# Altium PCB MainBoard_old.PcbDoc
Units mm, origin at the board's own origin, x right, y up, seen from the top; angles counter-clockwise.
Board outline 78.74 x 38.1 mm, 2 copper layers (Top Layer, Bottom Layer), stack 1.671 mm thick; 43 components, 29 nets, 188 pads, 17 vias.
Unrouted connection lines stored in the file: 48.
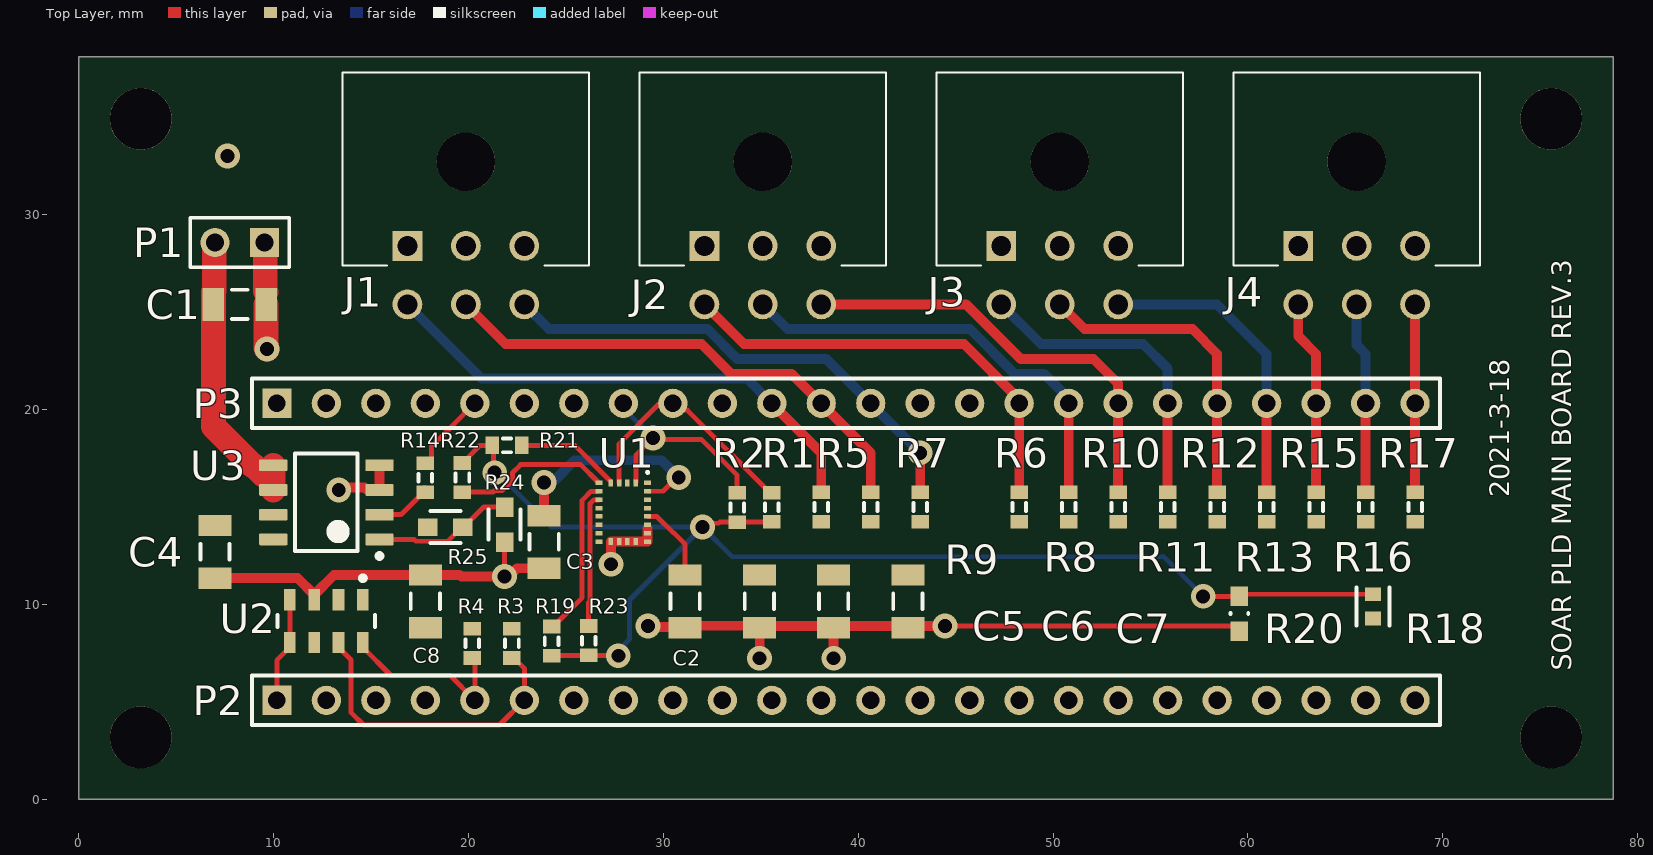
[diagram p0: Top Layer view]
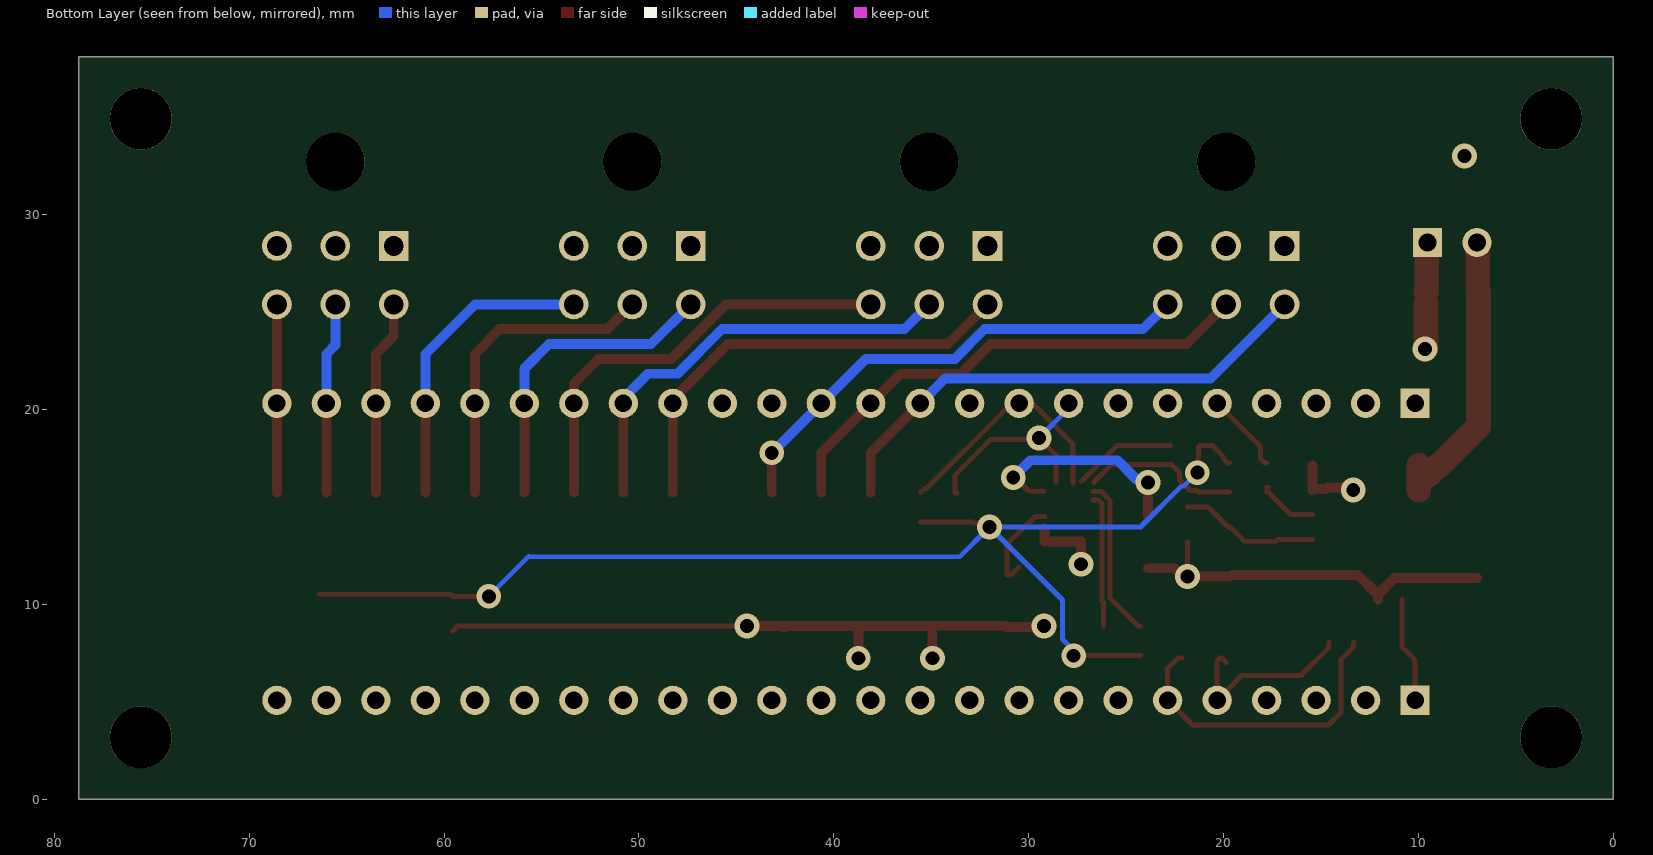
[diagram p1: Bottom Layer view, seen from below]

## Layer stack, top to bottom
Top Solder: solder mask 0.0102, Solder Resist, Dk 3.5
Top Layer: signal copper 0.0356
Dielectric 1: dielectric 1.6002, FR-4, Dk 4.8
Bottom Layer: signal copper 0.0356
Bottom Solder: solder mask 0.0102, Solder Resist, Dk 3.5

## Board outline
0,0 78.74,0 78.74,38.1 0,38.1

## Design rules (kind name [scope] priority, off if disabled: settings)
Clearance [All] p1: gap=0.152 ignorepadtopadclearanceinfootprint=FALSE
Height [All] p1: minheight=0 maxheight=50.8 prefheight=12.7
HoleSize [All] p1: absolutevalues=TRUE maxlimit=3.175 minlimit=0.001 maxpercent=80.000 minpercent=20.000
HoleToHoleClearance [All] p1: gap=0.006 allowstackedmicrovias=TRUE
MinimumAnnularRing [All] p1: minimumring=0.254
MinimumSolderMaskSliver [All] p1: minsoldermaskwidth=0
PolygonConnect [All] p1: connectstyle=Relief reliefconductorwidth=0.254 reliefentries=4 polygonreliefangle="90 Angle" airgapwidth=0.254
RoutingVias [All] p1: holewidth=0.711 width=1.27 viastyle="Through Hole" minholewidth=0.711 minwidth=1.27 maxholewidth=0.711 maxwidth=1.27
SilkToSilkClearance [All] p1: silktosilkclearance=0
SilkToSolderMaskClearance [IsPad] p1: minsilkscreentomaskgap=0 clearancetoexposedcopper=TRUE
SolderMaskExpansion [All] p1: expansion=0.003 istentingtop=FALSE
UnRoutedNet [All] p1: checkbadconnections=TRUE
Width [All] p1: maxlimit=1.27 minlimit=0.152 preferedwidth=0.254
23 further rules are at their usual default settings.

## Components (designator, comment, footprint, x,y, rotation, side; value= is the part's Value field where it differs from the comment)
C1 "Cap Semi" C1206 8.255,25.4 r180 top value=0.1uF
C2 "Cap Semi" C1206 31.115,10.16 r90 top value=10nF
C3 "Cap Semi" C1206 23.876,13.208 r90 top value=0.1uF
C4 "Cap Semi" C1206 6.985,12.7 r90 top value=0.1uF
C5 "Cap Semi" C1206 34.925,10.16 r90 top value=10uF
C6 "Cap Semi" C1206 38.735,10.16 r90 top value=0.1uF
C7 "Cap Semi" C1206 42.545,10.16 r90 top value=0.1uF
C8 "Cap Semi" C1206 17.78,10.16 r270 top value=10uF
J1 "0430450600" 0430450600 19.835,30.56 r180 top
J2 "0430450600" 0430450600 35.075,30.56 r180 top
J3 "0430450600" 0430450600 50.315,30.56 r180 top
J4 "0430450600" 0430450600 65.555,30.56 r180 top
P1 "Header 2" HDR1X2 9.525,28.575 r180 top
P2 "Header 24" HDR1X24 10.16,5.08 r0 top
P3 "Header 24" HDR1X24 10.16,20.32 r0 top
R1 "Res3" J1-0603 35.56,14.986 r270 top value=10K
R2 "Res3" J1-0603 33.782,14.974 r270 top value=10K
R3 "Res3" J1-0603 22.225,8.001 r90 top value=10K
R4 "Res3" J1-0603 20.193,8.001 r90 top value=10K
R5 "Res3" J1-0603 38.1,14.998 r90 top value=10K
R6 "Res3" J1-0603 48.26,14.998 r90 top value=10K
R7 "Res3" J1-0603 40.64,14.998 r90 top value=10K
R8 "Res3" J1-0603 50.8,14.998 r90 top value=10K
R9 "Res3" J1-0603 43.18,14.998 r90 top value=10K
R10 "Res3" J1-0603 53.34,14.998 r90 top value=10K
R11 "Res3" J1-0603 55.88,14.998 r90 top value=10K
R12 "Res3" J1-0603 58.42,14.998 r90 top value=10K
R13 "Res3" J1-0603 60.96,14.998 r90 top value=10K
R14 "Res3" J1-0603 17.78,16.498 r270 top value=250K
R15 "Res3" J1-0603 63.5,14.998 r90 top value=10K
R16 "Res3" J1-0603 66.04,14.998 r90 top value=10K
R17 "Res3" J1-0603 68.58,14.998 r90 top value=10K
R18 "105K" FP-RQ731J-IPC_C 66.421,9.897 r270 top value=105Ω
R19 "Res3" J1-0603 24.257,8.116 r90 top value=10K
R20 "931K" FP-RP73P-1J-MFG 59.563,9.525 r90 top value=931Ω
R21 "Res3" J1-0603 21.971,18.161 r180 top value=10K
R22 "Res3" J1-0603 19.685,16.51 r90 top value=10K
R23 "Res3" J1-0603 26.162,8.14 r270 top value=10K
R24 "340K" FP-RN731J-MFG 18.807,13.97 r0 top value=340KΩ
R25 "169K" FP-RN731J-MFG 21.844,14.097 r270 top value=169KΩ
U1 "LSM9DS1TR" STM-LGA-24_3500X3000X1000 27.94,14.732 r270 top
U2 "MS560702BA03-50" TECO-MS560702BA03-50_V 12.7,9.144 r270 top
U3 "TPS76633DR" D0008A_N 12.7,15.24 r180 top

## Footprints (in the part's own frame and the unit in brackets; to place one, negate y for a bottom-side part, rotate by r counter-clockwise, add the part's x,y. Pads: shape width x height; smd on the part's side, far side on the other; paste and mask are expansions set on the pad)
0430450600 [mm] "6-Pin Molex 3.00mm Pitch"
  round 3 hole 3 unplated mask+0.05: 0(-0.025,-2.16)
  rect 1.53x1.53 hole 1.02 mask+0.05: 1(2.975,2.16)
  round 1.53 hole 1.02 mask+0.05: 2(-0.025,2.16) 3(-3.025,2.16) 4(2.975,5.16) 5(-0.025,5.16) 6(-3.025,5.16)
  silkscreen extent -6.35,-6.75 6.3,3.17, body extent -6.6,-6.7 6.55,5.54, height 8.28
C1206 [mm] "Chip Capacitor, Body 3.2x1.6mm, IPC High Density"
  rect 1.1x1.7 smd: 1(-1.35,0) 2(1.35,0)
  silkscreen extent -0.4,-0.75 0.4,0.75, body extent -1.7,-0.9 1.7,0.9, height 1.3
D0008A_N [mm] "SOIC, 8-Leads, Body 5x4mm, Pitch 1.27mm, IPC Medium Density"
  rrect17% 1.45x0.6 smd: 1(-2.725,1.905) 2(-2.725,0.635) 3(-2.725,-0.635) 4(-2.725,-1.905) 5(2.725,-1.905) 6(2.725,-0.635) 7(2.725,0.635) 8(2.725,1.905)
  silkscreen extent -2.85,-2.5 1.6,2.88, body extent -3,-2.45 3,2.45, height 1.63
FP-RN731J-MFG [mm]
  rect 1x0.9 smd paste+0 mask+0: 1(-0.9,0) 2(0.9,0)
  silkscreen extent -0.77,-0.82 0.77,0.82, body extent -1.5,-0.55 1.5,0.55, height 0.25
FP-RP73P-1J-MFG [mm]
  rect 1x0.9 smd paste+0 mask+0: 1(-0.9,0) 2(0.9,0)
  silkscreen extent -0.03,-0.45 0.03,0.45, body extent -1.5,-0.55 1.5,0.55, height 0.25
FP-RQ731J-IPC_C [mm]
  rect 0.71x0.812 smd paste+0 mask+0: 1(-0.626,0) 2(0.626,0)
  silkscreen extent -0.98,-0.85 0.98,0.85, body extent -1.08,-0.55 1.08,0.55, height 0.25
HDR1X2 [mm] "Connector; Header; 2 Position"
  rect 1.5x1.5 hole 0.9: 1(0,0)
  round 1.5 hole 0.9: 2(2.54,0)
  silkscreen extent -1.27,-1.27 3.81,1.27
HDR1X24 [mm] "Connector; Header; 24 Position"
  rect 1.5x1.5 hole 0.9: 1(0,0)
  round 1.5 hole 0.9: 2(2.54,0) 3(5.08,0) 4(7.62,0) 5(10.16,0) 6(12.7,0) 7(15.24,0) 8(17.78,0) 9(20.32,0) 10(22.86,0) 11(25.4,0) 12(27.94,0) 13(30.48,0) 14(33.02,0) 15(35.56,0) 16(38.1,0) 17(40.64,0) 18(43.18,0) 19(45.72,0) 20(48.26,0) 21(50.8,0) 22(53.34,0) 23(55.88,0) 24(58.42,0)
  silkscreen extent -1.27,-1.27 59.69,1.27
J1-0603 [mm] "Chip Resistor, Body 1.6x0.8mm, IPC High Density"
  rect 0.7x0.9 smd: 1(-0.75,0) 2(0.75,0)
  silkscreen extent -0.2,-0.35 0.2,0.35, body extent -0.85,-0.48 0.85,0.48, height 0.9
STM-LGA-24_3500X3000X1000 [mm] "LGA, 24-Leads, Body 3.65x3.15mm, Pitch 0.43mm"
  rect 0.23x0.35 smd mask+0.05: 1(-1.505,1.25) 6(-1.505,-1.25) 7(-1.075,-1.25) 8(-0.645,-1.25) 9(-0.215,-1.25) 10(0.215,-1.25) 11(0.645,-1.25) 12(1.075,-1.25) 13(1.505,-1.25) 18(1.505,1.25) 19(1.075,1.25) 20(0.645,1.25) 21(0.215,1.25) 22(-0.215,1.25) 23(-0.645,1.25) 24(-1.075,1.25)
  rect 0.35x0.23 smd mask+0.05: 2(-1.505,0.645) 3(-1.505,0.215) 4(-1.505,-0.215) 5(-1.505,-0.645) 14(1.505,-0.645) 15(1.505,-0.215) 16(1.505,0.215) 17(1.505,0.645)
  silkscreen extent -2.11,1.19 -1.98,1.31, body extent -1.82,-1.57 1.83,1.58, height 1.03
TECO-MS560702BA03-50_V [mm] "SMD, 8-Leads, Body 3x5mm, Pitch 1.25mm"
  rect 1.1x0.6 smd: 1(-1.1,1.875) 2(-1.1,0.625) 3(-1.1,-0.625) 4(-1.1,-1.875) 5(1.1,-1.875) 6(1.1,-0.625) 7(1.1,0.625) 8(1.1,1.875)
  silkscreen extent -2.32,-2.5 0.32,2.5, body extent -1.5,-2.5 1.5,2.5, height 1

## Part data
C1 C2 C3 C4 C5 C6 C7 C8: "Capacitor (Semiconductor SIM Model)", LatestRevisionDate=29-May-2009, LatestRevisionNote="IPC-7351 Footprint Added.", PackageDescription="Chip Capacitor", PackageReference=C1206, Published=8-Jun-2000, Publisher="Altium Limited"
J1 J2 J3 J4: "CONN HEADER R/A 6POS 3MM", Current Rating (Amps)=8A, Insulation Color=Black, Manufacturer=Molex, Material Flammability Rating="UL94 V-0", Supplier Part Number 1=WM1815-ND, Voltage Rating=600V, ComponentLink1Description=Drawing, ComponentLink1URL=https://www.molex.com/pdm_docs/sd/430450600_sd.pdf, ComponentLink2Description="Product Specification", ComponentLink2URL=https://www.molex.com/pdm_docs/ps/PS-43045.pdf, Contact Finish - Mating=Tin, Contact Finish - Post=Tin, Contact Finish Thickness - Mating="100.0µin (2.54µm)", Contact Length - Post="0.125\" (3.18mm)", Contact Material=Brass, Contact Shape=Square, Contact Type="Male Pin", Fastening Type="Locking Ramp", Features="Board Lock", Insulation Height="0.290\" (7.37mm)", Insulation Material="Liquid Crystal Polymer (LCP), Glass Filled", Manufacturer Part Number=0430450600, Mounting Type="Through Hole, Right Angle", Number of Positions=6, Number of Rows=2, Row Spacing - Mating="0.118\" (3.00mm)", Shrouding="Shrouded - 4 Wall", Supplier 1=Digi-Key, Termination=Solder
P1: "Header, 2-Pin", LatestRevisionDate=17-Jul-2002, LatestRevisionNote="Re-released for DXP Platform.", Publisher="Altium Limited"
P2 P3: "Header, 24-Pin", LatestRevisionDate=17-Jul-2002, LatestRevisionNote="Re-released for DXP Platform.", Publisher="Altium Limited"
R1 R2 R3 R4 R5 R6 R7 R8 R9 R10 R11 R12 R13 R14 R15 R16 R17 R19 R21 R22 R23: "Resistor", LatestRevisionDate=29-May-2009, LatestRevisionNote="IPC-7351 Footprint Added.", PackageDescription="Chip Resistor", PackageReference=J1-0603, Published=8-Jun-2000, Publisher="Altium Limited"
R18: library part CMP-03211-009462-1, "RQ73 0603 105Ω  0.15W 10ppm/°C 0.1% 75V", Manufacturer=TE, Manufacturer Part Number=RQ73C1J105RBTD, Package=RQ731J, Power Rating=0.15W, Resistance=105Ω, Temperature="-55°C to +155°C", Temperature Coefficient=10ppm/°C, Temperature Range High=+155°C, Temperature Range Low=-55°C, Tolerance=0.1%, Voltage Rating=75V, Automotive=Yes, Automotive Grade="Grade 0", Category=Res, ComponentLink2Description=Datasheet, ComponentLink2URL=https://www.te.com/commerce/DocumentDelivery/DDEController?Action=showdoc&DocId=Data+Sheet%7F1773270-2%7FA%7Fpdf%7FEnglish%7FENG_DS_1773270-2_A.pdf%7F4-2176362-2, Composition="Thin Film", Device Class L1="Passive Components", Device Class L2=Resistors, Device Class L3="Chip SMD Resistors", Height=0.6mm, Ipc Land Pattern Name=RESC15580X45, Lead Free=Yes, Octopart=https://octopart.com/rq73c1j105rbtd-te+connectivity-93908198, RoHS=TRUE, Series=RQ73
R20: library part CMP-03211-003729-1, "RES SMD 931 OHM 0.1% 1/6W 0603", Manufacturer="TE Connectivity", Manufacturer Part Number=RP73PF1J931RBTDF, Package=RP73P-1J, Power Rating=0.166W, Resistance=931Ω, Temperature="-55°C to +155°C", Temperature Coefficient=25ppm/°C, Temperature Range High=+155°C, Temperature Range Low=-55°C, Tolerance=0.001, Voltage Rating=100V, Automotive=No, Category=Res, ComponentLink2Description=Datasheet, ComponentLink2URL=https://www.te.com/commerce/DocumentDelivery/DDEController?Action=srchrtrv&DocNm=1773272&DocType=DS&DocLang=English, Composition="Thin Film", Device Class L1="Passive Components", Device Class L2=Resistors, Device Class L3="Chip SMD Resistors", Digikey Description="RES SMD 931 OHM 0.1% 1/6W 0603", Height=0.55mm, Ipc Land Pattern Name=RESC15580X45, Lead Free=Yes, Octopart=https://octopart.com/rp73pf1j931rbtdf-te+connectivity-45466309, RoHS=TRUE, Series=RP73P
R24: library part CMP-03211-007046-1, "Thin Film Resistors RN 0603 340KΩ 0.1% 10ppm/°C", Manufacturer="TE Connectivity", Manufacturer Part Number=RN73C1J340KBTD, Package=RN731J, Power Rating=0.063W, Resistance=340KΩ, Temperature="-55°C to +155°C", Temperature Coefficient=10ppm/°C, Temperature Range High=+155°C, Temperature Range Low=-55°C, Tolerance=0.1%, Voltage Rating=50V, Automotive=No, Category=Res, ComponentLink2Description=Datasheet, ComponentLink2URL=https://www.te.com/commerce/DocumentDelivery/DDEController?Action=showdoc&DocId=Data+Sheet%7F1773270%7FP%7Fpdf%7FEnglish%7FENG_DS_1773270_P.pdf%7F9-1614352-9, Composition="Thin Film", Device Class L1="Passive Components", Device Class L2=Resistors, Device Class L3="Chip SMD Resistors", Height=0.55mm, Ipc Land Pattern Name=RESC15580X45, Lead Free=Yes, Octopart=https://octopart.com/rn73c1j340kbtd-te+connectivity-76689871, octopart_url=https://octopart.com/rn73c1j340kbtd-te+connectivity-76689871, Packaging="5000 Reel", RoHS=TRUE, Series=RN73
R25: library part CMP-03211-006461-1, "Thin Film Resistors RN 0603 169KΩ 0.1% 10ppm/°C", Manufacturer="TE Connectivity", Manufacturer Part Number=RN73C1J169KBTDF, Package=RN731J, Power Rating=0.063W, Resistance=169KΩ, Temperature="-55°C to +155°C", Temperature Coefficient=10ppm/°C, Temperature Range High=+155°C, Temperature Range Low=-55°C, Tolerance=0.1%, Voltage Rating=50V, Automotive=No, Category=Res, ComponentLink2Description=Datasheet, ComponentLink2URL=https://www.te.com/commerce/DocumentDelivery/DDEController?Action=showdoc&DocId=Data+Sheet%7F1773270%7FP%7Fpdf%7FEnglish%7FENG_DS_1773270_P.pdf%7F9-1614352-9, Composition="Thin Film", Device Class L1="Passive Components", Device Class L2=Resistors, Device Class L3="Chip SMD Resistors", Height=0.55mm, Ipc Land Pattern Name=RESC15580X45, Lead Free=Yes, Octopart=https://octopart.com/rn73c1j169kbtdf-te+connectivity-22738579, octopart_url=https://octopart.com/rn73c1j169kbtdf-te+connectivity-22738579, Packaging="1000 Reel", RoHS=TRUE, Series=RN73
U1: library part CMP-2000-06606-1, "iNEMO Inertial Module: 3D Accelerometer, 3D Gyroscope, 3D Magnetometer, 1.9 to 3.6 V, -40 to 85 degC, 24-Pin LGA, RoHS, Tape and Reel", Manufacturer=STMicroelectronics, Package Description="24-Pin Plastic Land Grid Array Package, Body 3.65 x 3.15 mm, Pitch 0.43 mm", Package Reference=LGA-24_3500X3000X1000, PartNumber=LSM9DS1, Sensor Case Style=LGA, Supply Voltage Max=3.6V, Supply Voltage Min=1.9V, Acceleration Range=±2g,±4g,±8g,±16g, Datasheet URL=http://www2.st.com/content/ccc/resource/technical/document/datasheet/1e/3f/2a/d6/25/eb/48/46/DM00103319.pdf/files/DM00103319.pdf/jcr:content/translations/en.DM00103319.pdf, Datasheet Version="Rev. 3, 03/2015", Gyroscope Range=±245°/s,±500°/s,±2000°/s, Manufacturer URL=http://www.st.com/, MEMS Module Function=Tri-AxisGyroscope,Tri-AxisAccelerometer,Tri-AxisMagnetometer, Mounting Technology=SurfaceMount, MSL=MSL3-168hours, No. of Pins=24Pins, Packaging=CutTape, Product Range=-, SVHC=NoSVHC(17-Dec-2015)
U2: library part CMP-2000-07512-1, "Barometric Pressure Sensor, with Stainless Steel Cap , 1.8 to 3.6 V, -40 to 85 degC, 8-Pin SMD, RoHS, Tape and Reel", Manufacturer="TE Connectivity", Package Description="8-Pin Surface Mount Device, Body 3 x 5 mm, Pitch 1.25 mm", Datasheet URL=http://www.te.com/commerce/DocumentDelivery/DDEController?Action=showdoc&DocId=Data+Sheet%7FMS5607-02BA03%7FB2%7Fpdf%7FEnglish%7FENG_DS_MS5607-02BA03_B2.pdf%7FMS560702BA03-50, Datasheet Version=06/2017, Lead Free=LeadFree, Manufacturer URL=http://www.te.com/, Mounting Technology=SurfaceMount, Package Reference=MS560702BA03-50, RoHSCompliant=false
U3: library part CMP-0394-00013-2, "Single Output LDO, 250 mA, Fixed 3.3 V Output, 2.7 to 10 V Input, with Low IQ, 8-pin SOIC (D), -40 to 125 degC, Green (RoHS & no Sb/Br)", Manufacturer="Texas Instruments", Power Good=TRUE, Code_JEDEC=MS-012, ComponentLink1Description="Manufacturer URL", ComponentLink1URL=http://www.ti.com/, ComponentLink2Description=Datasheet, ComponentLink2URL=http://www.ti.com/general/docs/lit/getliterature.tsp?genericPartNumber=TPS76633&fileType=pdf, ComponentLink3Description="Package Specification", ComponentLink3URL=http://www.ti.com/litv/pdf/msoi002j, DatasheetVersion=SLVS237C, Eco-Plan="Green (RoHS & no Sb/Br)", Fixed Output Options(V)=3.3, Iout(Max)(A)=0.25, Iq(Typ)(mA)=0.03, Mounting Technology="Surface Mount", PackageDescription="8-Pin Plastic Small Outline, Body 4.9 x 3.9 mm, Pitch 1.27 mm", PackageReference=D0008A, PackageVersion=4040047-3/M, PartNumber=TPS76633DR, SubFamily="Single Channel LDO", Vdo(Typ)(mV)=230, Vin(Max)(V)=10, Vin(Min)(V)=2.7, Vout Adj(Max)(V)=3.3, Vout Adj(Min)(V)=3.3

## Free pads (board coordinates)
  round 3.175 hole 3.175: ""(3.175,3.175) ""(3.175,34.925) ""(75.565,3.175) ""(75.565,34.925)

## Via types
v1: diameter 1.27, hole 0.711, Top Layer to Bottom Layer, 16 vias
v2: diameter 1.27, hole 0.711, Top Layer to Bottom Layer, tented top, 1 vias

## Nets (pads, with @x,y where several pads share a name; then routed paths per layer and width w, separated by ;. In a path a pad name is that pad's centre, name@x,y a point inside that pad or via, vN(x,y) a via of type N, cw(c..) or ccw(c..) an arc to the next point about the centre after c; other vN are vias at no path point)
A0: J1.6 P3.13 R9.2 | length 25.5
  Top Layer w0.508: R9.2 v1(43.18,17.78)
  Bottom Layer w0.508: J1.6 24.133,24.127 32.261,24.127 33.785,22.603 38.357,22.603 v1(43.18,17.78)
A1: J1.5 P3.12 R7.2 | length 26
  Top Layer w0.508: J1.5 21.895,23.365 31.945,23.365 33.469,21.841 36.579,21.841 40.64,17.78 R7.2
A2: J1.4 P3.11 R5.2 | length 26.6
  Top Layer w0.508: J1.4@16.764,25.304 J1.4 ; P3.11 38.1,17.78 R5.2
  Bottom Layer w0.508: J1.4 20.67,21.59 34.29,21.59 P3.11
A14: J4.6 P3.24 R17.2 | length 9.7
  Top Layer w0.508: R17.2 P3.24 J4.6
A15: J4.5 P3.23 R16.2 | length 9.8
  Top Layer w0.508: R16.2 P3.23
  Bottom Layer w0.508: J4.5 65.58,23.32 66.04,22.86 P3.23
A16: J4.4 P3.22 R15.2 | length 10
  Top Layer w0.508: J4.4 62.58,23.78 63.5,22.86 P3.22 R15.2
A17: J3.6 P3.21 R13.2 | length 15.8
  Top Layer w0.508: R13.2 P3.21
  Bottom Layer w0.508: J3.6 58.42,25.4 60.96,22.86 P3.21
A18: J3.5 P3.20 R12.2 | length 16.2
  Top Layer w0.508: J3.5 51.613,24.127 57.153,24.127 58.42,22.86 P3.20 R12.2
A19: J3.4 P3.19 R11.2 | length 16.4
  Top Layer w0.508: J3.4 J3.4@47.498,25.4 ; R11.2 P3.19
  Bottom Layer w0.508: J3.4 49.375,23.365 54.61,23.365 55.88,22.095 P3.19
A20: J2.6 P3.18 R10.2 | length 22.5
  Top Layer w0.508: J2.6 45.54,25.4 48.337,22.603 52.07,22.603 53.337,21.336 53.337,20.323 P3.18 R10.2
A21: J2.5 P3.17 R8.2 | length 22.5
  Top Layer w0.508: R8.2 P3.17 P3.17@50.8,20.571
  Bottom Layer w0.508: J2.5 36.373,24.127 45.735,24.127 48.021,21.841 49.53,21.841 P3.17@50.8,20.571
A22: J2.4 P3.16 R6.2 | length 23
  Top Layer w0.508: J2.4 34.135,23.365 45.419,23.365 48.26,20.524 P3.16 R6.2
GND: C1.1 C2.1 C3.1 C4.1 C5.1 C6.1 C7.1 C8.1 J1.1 J1.2 J1.3 J2.1 J2.2 J2.3 J3.1 J3.2 J3.3 J4.1 J4.2 J4.3 P1.1 P2.1 P3.15 R20.1 R25.2 U1.14 U1.15 U1.16 U1.17 U1.18 U1.19 U1.20 U2.3 U2.4 U2.5 U3.3 U3.4 | length 71.3
  Top Layer w0.254: P2.1 10.16,7.129 10.825,7.794 U2.5 U2.4 ; v1(21.844,11.43) R25.2 ; v1(44.45,8.89) 59.298,8.89 R20.1
  Top Layer w0.508: C4.1 11.219,11.35 U2.3@12.075,10.494 ; U2.3 U2.3@12.075,10.494 ; v1(13.335,15.875) 13.462,16.002 14.662,16.002 14.743,15.921 15.379,15.921 U3.3 U3.4 ; C3.1 22.478,11.858 22.05,11.43 v1(21.844,11.43) 19.629,11.43 19.549,11.51 C8.1 13.091,11.51 U2.3@12.075,10.494 ; v1(27.305,12.065) 27.305,13.213 27.307,13.215 U1.14 U1.15 U1.16 U1.17 U1.18 U1.19 29.19,13.894 ; v1(29.21,8.89) 29.25,8.85 31.075,8.85 C2.1 31.209,8.904 34.831,8.904 34.943,8.792 34.943,7.257 v1(34.925,7.239) ; C5.1@34.925,8.89 38.655,8.89 C6.1 ; v1(38.735,7.239) C6.1 ; v1(44.45,8.89) 42.625,8.89 C7.1 42.465,8.89 38.815,8.89 C6.1
  Top Layer w1.27: P1.1@9.565,28.575 9.565,26.075 C1.1@9.605,26.035 ; C1.1 9.605,23.161 v1(9.652,23.114)
NetC1_2: C1.2 P1.2 U3.5 U3.6 | length 14.4
  Top Layer w1.27: P1.2@6.985,28.615 6.945,28.575 6.945,26.075 6.905,26.035 C1.2 6.905,19.13 8.906,17.129 8.966,17.129 9.463,16.633 ; U3.6 9.975,16.633 U3.5
NetC2_2: C2.2 U1.21 | length 4.9
  Top Layer w0.254: U1.21 29.202,14.505 29.672,14.505 30.48,13.697 30.499,13.697 31.115,13.081 C2.2 30.903,11.51 C2.2@30.48,11.933
NetC3_2: C3.2 U1.24 | length 11.1
  Top Layer w0.229: U1.24 29.977,15.807
  Top Layer w0.254: 29.977,15.807 30.68,16.51 v2(30.789,16.51)
  Top Layer w0.508: C3.2 v1@23.876,16.002
  Bottom Layer w0.508: v1(23.876,16.256) 24.022,16.402 24.446,16.402 25.444,17.399 29.9,17.399 v2(30.789,16.51)
NetR14_2: R14.2 U3.2 | length 2.9
  Top Layer w0.254: U3.2 16.531,14.605 17.457,15.531 17.457,15.537 17.68,15.76 R14.2@17.78,15.76 ; R14.2@17.68,16.002 R14.2@17.78,16.002
NetR19_2: R19.2 U1.7 | length 8.2
  Top Layer w0.254: R19.2@24.257,8.878 24.357,8.878 25.829,10.35 25.829,15.346 26.278,15.795 26.678,15.795 U1.7
NetR21_1: R21.1 U1.5 | length 5.3
  Top Layer w0.254: R21.1 25.451,18.161 U1.5@27.283,16.329
NetR22_1: R22.1 U1.6 | length 8.2
  Top Layer w0.254: R22.1 21.262,15.76 21.351,15.85 21.715,15.85 22.25,16.385 22.25,16.749 22.672,17.17 25.756,17.17 26.642,16.284 U1.6@26.642,16.249
NetR23_1: R23.1 U1.8 | length 6.9
  Top Layer w0.254: R23.1 26.162,10.108 26.236,10.182 26.236,15.178 26.423,15.365 26.678,15.365 U1.8
NetR24_2: R24.2 R25.1 U3.1 | length 7.2
  Top Layer w0.254: U3.1 17.197,13.335 17.291,13.241 18.928,13.241 19.657,13.97 R24.2 19.757,13.97 20.784,14.997 R25.1
P1: R1.2 R2.2 R18.1 R19.1 R20.2 R21.2 R22.2 R23.2 | length 66.7
  Top Layer w0.254: R22.2 19.785,17.26 20.008,17.483 20.008,17.583 20.586,18.161 R21.2 21.278,18.103 21.278,16.822 v1(21.336,16.764) ; R19.1 24.269,7.378 26.15,7.378 R23.2 26.174,7.378 27.674,7.378 v1(27.686,7.366) ; v1(32.004,13.97) 32.198,14.164 32.833,14.164 32.893,14.224 R2.2 33.788,14.23 35.554,14.23 R1.2 ; v1(57.702,10.414) 59.552,10.414 R20.2 59.661,10.523 R18.1
  Bottom Layer w0.254: v1(21.336,16.764) 22.035,16.066 22.162,16.066 24.257,13.97 v1(32.004,13.97) ; v1(27.686,7.366) 27.686,7.641 28.258,8.212 28.258,10.223 v1(32.004,13.97) ; v1(57.702,10.414) 55.648,12.468 55.626,12.446 33.528,12.446 v1(32.004,13.97)
PWR_OK: P3.5 R14.1 | length 4.2
  Top Layer w0.254: R14.1@17.78,17.26 17.88,17.26 18.103,17.483 18.103,18.103 P3.5
SCL0: P3.8 R2.1 U1.2 | length 11.2
  Top Layer w0.254: U1.2@28.585,16.285 28.585,17.663 v1(29.464,18.542) 29.553,18.453 31.966,18.453 33.782,16.637 R2.1 R2.1@33.682,15.724
  Bottom Layer w0.254: P3.8 27.94,20.066 v1(29.464,18.542)
SCL2: P2.5 R4.1 U2.8 | length 9.7
  Top Layer w0.254: U2.8 14.575,7.794 16.019,6.35 19.05,6.35 P2.5 20.32,7.112 R4.1@20.193,7.239 ; R4.1@19.87,7.028 20.093,7.251 R4.1
SDA0: P3.9 R1.1 U1.4 | length 12.6
  Top Layer w0.254: U1.4 27.725,18.24 29.775,20.29 30.45,20.29 P3.9 30.817,20.32 31.165,19.972 31.224,19.972 35.237,15.959 35.337,15.959 R1.1
SDA2: P2.6 R3.1 U2.7 | length 16.1
  Top Layer w0.254: U2.7 13.325,7.794 13.97,7.149 13.97,4.445 14.605,3.81 21.59,3.81 P2.6 22.86,6.716 22.325,7.251 R3.1 R3.1@22.125,7.251
VCC: C4.2 C5.2 C6.2 C7.2 C8.2 P3.1 R3.2 R4.2 R5.1 R6.1 R7.1 R8.1 R9.1 R10.1 R11.1 R12.1 R13.1 R15.1 R16.1 R17.1 R18.2 R24.1 U1.1 U1.3 U1.22 U1.23 U2.1 U2.2 U3.7 U3.8
pads on no net: J1.0 J2.0 J3.0 J4.0 P2.2 P2.3 P2.4 P2.7 P2.8 P2.9 P2.10 P2.11 P2.12 P2.13 P2.14 P2.15 P2.16 P2.17 P2.18 P2.19 P2.20 P2.21 P2.22 P2.23 P2.24 P3.2 P3.3 P3.4 P3.6 P3.7 P3.10 P3.14 U1.9 U1.10 U1.11 U1.12 U1.13 U2.6
copper on no net:
  other v1: 7.62,33.02

## Silkscreen, mask and mechanical layers (free items; w line width, h text height)
Top Overlay:
  text "2021-3-18" at 73.406,15.494 h1.02 r90
  text "SOAR PLD MAIN BOARD REV.3" at 76.581,6.604 h1.02 r90
Mechanical 1:
  the board outline again, w0.254